# Altium PCB plc.PcbDoc
Units mm, origin at the board's own origin, x right, y up, seen from the top; angles counter-clockwise.
Board outline 93.36 x 87.51 mm, 2 copper layers (Top Layer, Bottom Layer); 106 components, 112 nets, 344 pads, 48 vias.
Unrouted connection lines stored in the file: 157.
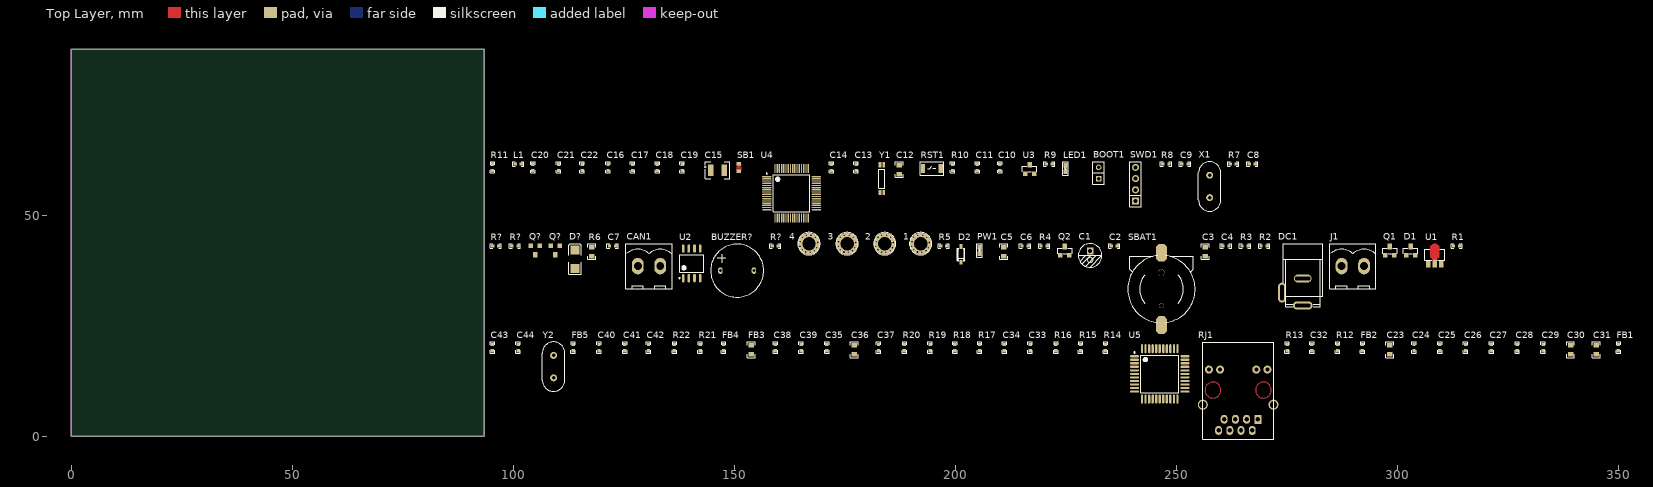
[diagram p0: Top Layer view]
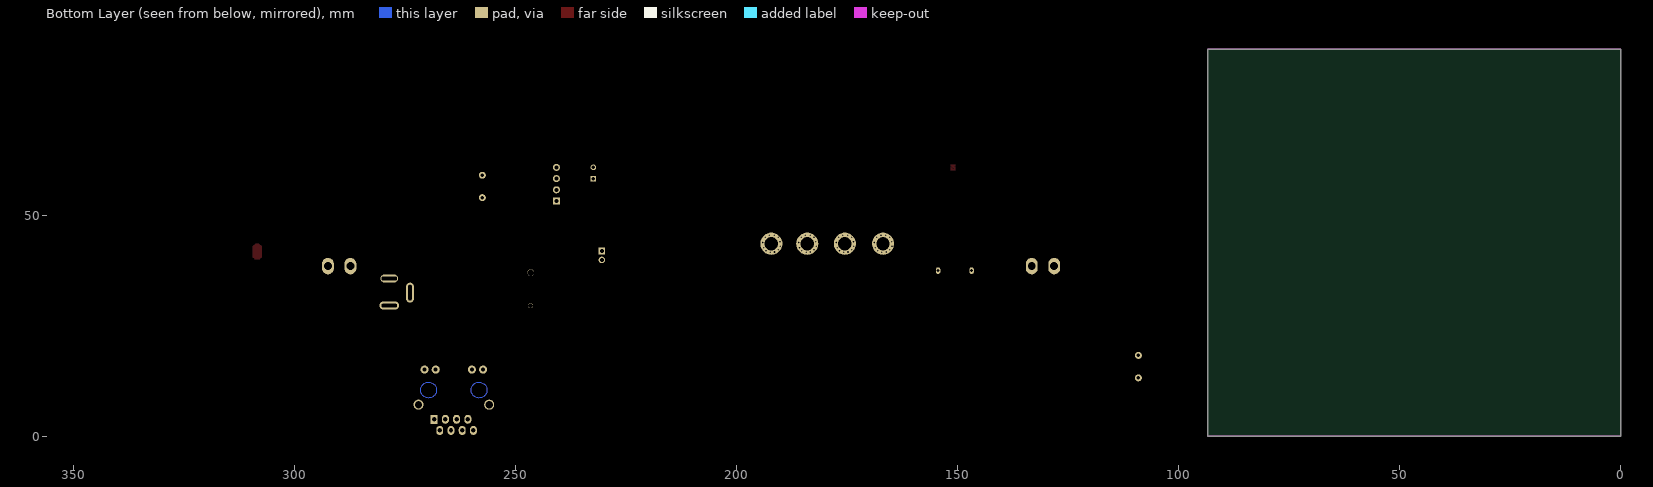
[diagram p1: Bottom Layer view, seen from below]

## Layer stack, top to bottom
Top Solder: solder mask 0.0102, Solder Resist, Dk 3.5
Top Layer: signal copper 0.0356
Dielectric 1: dielectric 0.32, FR-4, Dk 4.8
Bottom Layer: signal copper 0.0356
Bottom Solder: solder mask 0.0102, Solder Resist, Dk 3.5

## Board outline
0,0 0,87.51 93.36,87.51 93.36,0

## Design rules (kind name [scope] priority, off if disabled: settings)
Clearance [All] p1: gap=0.254
PolygonConnect [All] p1: connectstyle=Relief reliefconductorwidth=0.254 reliefentries=4 polygonreliefangle="90 Angle" airgapwidth=0.254
RoomDefinition mcu [InComponentClass('mcu')] p1: confinementstyle=ConfineIn formatcopy=TRUE lockcomponents=FALSE outline 94.488,47.625 269.113,47.625 269.113,64.897 94.488,64.897
RoomDefinition interface [InComponentClass('interface')] p2: confinementstyle=ConfineIn formatcopy=TRUE lockcomponents=FALSE outline 94.488,22.86 314.96,22.86 314.96,46.355 94.488,46.355
RoomDefinition Ethernet [InComponentClass('Ethernet')] p3: confinementstyle=ConfineIn formatcopy=TRUE lockcomponents=FALSE outline 94.488,-1.016 353.695,-1.016 353.695,24.13 94.488,24.13
RoutingVias [All] p1: holewidth=0.711 width=1.27 viastyle="Through Hole" minholewidth=0.711 minwidth=1.27 maxholewidth=0.711 maxwidth=1.27
SolderMaskExpansion [All] p1: expansion=0.102
Width [All] p1: maxlimit=0.254 minlimit=0.254 preferedwidth=0.254
30 further rules are at their usual default settings.

## Classes and differential pairs
component class mcu: BOOT1 C8 C9 C10 C11 C12 C13 C14 C15 C16 C17 C18 C19 C20 C21 C22 L1 LED1 R7 R8 R9 R10 R11 RST1 SB1 SWD1 U3 U4 X1 Y1
component class interface: 1 2 3 4 BUZZER? C1 C2 C3 C4 C5 C6 C7 CAN1 D1 D2 D? DC1 J1 PW1 Q1 Q2 Q? R1 R2 R3 R4 R5 R6 R? SBAT1 U1 U2
component class Ethernet: C23 C24 C25 C26 C27 C28 C29 C30 C31 C32 C33 C34 C35 C36 C37 C38 C39 C40 C41 C42 C43 C44 FB1 FB2 FB3 FB4 FB5 R12 R13 R14 R15 R16 R17 R18 R19 R20 R21 R22 RJ1 U5 Y2

## Components (designator, comment, footprint, x,y, rotation, side; value= is the part's Value field where it differs from the comment)
1 "TP" HOLE53 192.151,43.561 r90 top
2 "TP" HOLE53 184.023,43.561 r90 top
3 "TP" HOLE53 175.514,43.561 r90 top
4 "TP" HOLE53 166.878,43.561 r90 top
BOOT1 "CON2" SIP2 232.41,58.293 r90 top
BUZZER? "BEEP" BUZZER 150.622,37.465 r0 top
C1 "FP-6R3RE271M-F8" 6R3RE271M 230.505,40.894 r0 top
C2 "104" 0603C 235.966,43.053 r0 top
C3 "475" 0805 256.54,41.783 r0 top
C4 "104" 0603C 261.239,43.053 r0 top
C5 "475" 0805 210.947,41.783 r0 top
C6 "104" 0603C 215.773,43.053 r0 top
C7 "103" 0603C 122.428,43.053 r0 top
C8 "27pF" 0603C 267.208,61.595 r0 top
C9 "27pF" 0603C 251.968,61.595 r0 top
C10 "10pF" 0603C 210.058,60.833 r90 top
C11 "105" 0603C 204.978,60.833 r90 top
C12 "225" 0805 187.325,60.325 r0 top
C13 "10pF" 0603C 177.546,60.833 r90 top
C14 "105" 0603C 171.958,60.833 r90 top
C15 "10uF/16V" TAN-B 146.177,60.198 r0 top
C16 "104" 0603C 121.412,60.833 r90 top
C17 "104" 0603C 127,60.833 r90 top
C18 "104" 0603C 132.588,60.833 r90 top
C19 "104" 0603C 138.176,60.833 r90 top
C20 "104" 0603C 104.394,60.833 r90 top
C21 "105" 0603C 110.236,60.833 r90 top
C22 "102" 0603C 115.57,60.833 r90 top
C23 "10uF" 0805 298.323,19.558 r0 top
C24 "104" 0603C 303.784,20.066 r90 top
C25 "104" 0603C 309.626,20.066 r90 top
C26 "104" 0603C 315.468,20.066 r90 top
C27 "104" 0603C 321.31,20.066 r90 top
C28 "102" 0603C 327.152,20.066 r90 top
C29 "22pF" 0603C 332.994,20.066 r90 top
C30 "10uF" 0805 339.217,19.558 r0 top
C31 "10uF" 0805 345.059,19.558 r0 top
C32 "104" 0603C 280.67,20.066 r90 top
C33 "682" 0603C 216.916,20.066 r90 top
C34 "682" 0603C 211.074,20.066 r90 top
C35 "104" 0603C 170.942,20.066 r90 top
C36 "10uF" 0805 177.165,19.558 r0 top
C37 "104" 0603C 182.626,20.066 r90 top
C38 "103" 0603C 159.258,20.066 r90 top
C39 "103" 0603C 165.1,20.066 r90 top
C40 "104" 0603C 119.38,20.066 r90 top
C41 "104" 0603C 125.222,20.066 r90 top
C42 "102" 0603C 130.556,20.066 r90 top
C43 "27pF" 0603C 95.25,20.066 r90 top
C44 "27pF" 0603C 101.092,20.066 r90 top
CAN1 "CON2" INTERFACE-2 130.683,38.481 r0 top
D1 "BAT54" BAT54 303.022,41.91 r0 top
D2 "5.1V" SOD-123_1N5819HW 201.295,41.148 r90 top
D? "Diode" 1N5819S 113.919,37.973 r90 top
DC1 "DC-10B" DC-JACK 278.638,35.687 r90 top
FB1 "1uH" 0603R 350.012,20.066 r90 top
FB2 "1uH" 0603R 292.1,20.066 r90 top
FB3 "1uH" 0805 153.797,19.558 r0 top
FB4 "1uH" 0603R 147.574,20.066 r90 top
FB5 "1uH" 0603R 113.538,20.066 r90 top
J1 "CON2" INTERFACE-2 289.941,38.481 r0 top
L1 "1uH" 0603C 101.092,61.595 r0 top
LED1 "GREEN" LED-0603 224.917,60.579 r90 top
PW1 "RED" LED-0603 205.486,42.037 r90 top
Q1 "AP2305N/SOT-23" AP2305N_SOT23 298.323,41.91 r0 top
Q2 "AP2305N/SOT-23" AP2305N_SOT23 224.79,41.91 r0 top
Q? "BTC2411S3/SOT-323" SOT-23_HMBT3904 104.902,42.037 r0 top
Q? "HMBT3904/SOT-23" SOT-23_HMBT3904 109.474,42.037 r0 top
R1 "0R" 0603C 313.436,43.053 r0 top
R2 "2K" 0603C 269.875,43.053 r0 top
R3 "15K" 0603C 265.557,43.053 r0 top
R4 "4K7" 0603C 220.091,43.053 r0 top
R5 "10K" 0603C 197.358,43.053 r0 top
R6 "120R" 0805 117.729,41.783 r0 top
R7 "390R" 0603C 262.89,61.595 r0 top
R8 "47K" 0603C 247.65,61.595 r0 top
R9 "2K" 0603C 221.234,61.595 r0 top
R10 "10K" 0603C 199.39,60.833 r90 top
R11 "10K" 0603R 95.25,60.833 r90 top
R12 "100K" 0603R 286.512,20.066 r90 top
R13 "49R9" 0603R 275.082,20.066 r90 top
R14 "10R" 0603R 233.934,20.066 r90 top
R15 "49R9" 0603R 228.346,20.066 r90 top
R16 "22R" 0603R 222.758,20.066 r90 top
R17 "49R9" 0603R 205.486,20.066 r90 top
R18 "1K" 0603C 199.898,20.066 r90 top
R19 "1K" 0603C 194.31,20.066 r90 top
R20 "49R9" 0603R 188.468,20.066 r90 top
R21 "12K4" 0603R 142.24,20.066 r90 top
R22 "2M" 0603R 136.398,20.066 r90 top
R? "470R" 0603C 100.33,43.053 r0 top
R? "10K" 0603C 96.012,43.053 r0 top
R? "0R" 0603C 159.258,43.053 r0 top
RJ1 "HR911105A" HR911105A 264.414,14.732 r90 top
RST1 "SW" 5032-s 194.691,60.579 r0 top
SB1 "Circuit Breaker" JP2_SMD-2 151.003,60.833 r90 top
SBAT1 "BATTERY" LI1220_1 246.634,33.274 r90 top
SWD1 "CON4" SIP4 240.792,53.213 r90 top
U1 "AT5250/SOT-89" AT5250 308.483,38.989 r0 top
U2 "TJA1050" SOP-8 140.335,39.116 r90 top
U3 "XC61CN2702" XC61CN2702 216.789,60.452 r0 top
U4 "STM32F103RDT6" LQFP64_M 162.941,54.991 r0 top
U5 "ENC424J600/TQFP44" TQFP44 246.253,14.097 r0 top
X1 "8M" XTAL 257.556,56.515 r90 top
Y1 "32K768Hz" 32K768Hz 183.388,58.293 r90 top
Y2 "25Mhz" XTAL 109.093,15.748 r90 top

## Footprints (in the part's own frame and the unit in brackets; to place one, negate y for a bottom-side part, rotate by r counter-clockwise, add the part's x,y. Pads: shape width x height; smd on the part's side, far side on the other; paste and mask are expansions set on the pad)
1N5819S [mil]
  rect 80x80 smd: 1(0,0) 2(165,0)
  silkscreen extent -50,-56 221,57
6R3RE271M [mil]
  rect 58x58 / inner round 0 / far side rect 58x58 hole 35 mask+10: 1(0,40)
  round 58 / inner round 0 / far side round 58 hole 35 mask+10: 2(0,-40)
  silkscreen extent -105,-105 105,105
32K768Hz [mm]
  rect 1.2x0.6 smd: 1(3.15,0.45) 2(-3.15,0.45) 3(-3.15,-0.45) 4(3.15,-0.45)
  silkscreen extent -2.16,-0.66 2.16,0.69
0603C [mil]
  rect 30x30 smd: 1(27.5,0) 2(-27.5,0)
  silkscreen extent -50,-20 50,20
0603R [mil]
  rect 30x30 smd: 1(27.5,0) 2(-27.5,0)
  silkscreen extent -50,-20 50,20
0805 [mil]
  rect 50x40 smd: 1(0,40) 2(0,-40)
  silkscreen extent -35,-70 35,70
5032-s [mm]
  rect 1x2 smd: 1(-2,0) 2(2,0)
  silkscreen extent -2.64,-1.5 2.67,1.5
AP2305N_SOT23 [mil]
  rect 40x50 smd: D(0,40)
  rect 40x40 smd: G(-40,-40) S(40,-40)
  silkscreen extent -65,-25 65,25
AT5250 [mil]
  rect 40x60 smd mask+10: 1(-60,-3.75) 3(60,-3.75)
  rect 40x75 smd mask+10: 2(0,3.75)
  Top Layer region: 14.19,181.71 14.38,181.64 40.38,156.64 40.38,156.63 40.38,156.63 40.46,156.45 40.54,156.26 40.54,156.26 40.54,156.25 40.54,61.25 40.38,60.87 23.54,44.03 23.54,41.25 23.38,40.87 23,40.71 -23,40.71 -23.38,40.87 -23.54,41.25 -23.54,44.03 -40.38,60.87 -40.54,61.25 -40.54,156.25 -40.54,156.26 -40.54,156.27 -40.46,156.45 -40.38,156.63 -40.37,156.64 -40.37,156.65 -13.37,181.65 -13.18,181.72 -13,181.79 14,181.79
  silkscreen extent -90,31 90,131
BAT54 [mil]
  rect 40x40 smd: 1(-40,-40) 2(40,-40)
  rect 40x50 smd: 3(0,40)
  silkscreen extent -65,-25 65,25
BUZZER [mm]
  oval 1x1.5 hole 0.65: 1(-3.796,-0.001) 2(3.804,-0.001)
  silkscreen extent -5.99,-6 6,6
DC-JACK [mm]
  oval 1.8x4.5 hole 0.8 slot 3.5 at 90 deg mask+0.151: 1(-6.121,0.025)
  oval 1.8x4 hole 0.8 slot 3.5 at 90 deg mask+0.151: 2(0,0.025)
  oval 4.5x1.8 hole 0.8 slot 3.5 at 0 deg mask+0.151: 3(-3.2,4.724)
  silkscreen extent -6.35,-4.53 7.85,4.47
HOLE53 [mm]
  round 5 hole 3: 1(0,0)
  silkscreen extent -2.54,-2.54 2.54,2.54
HR911105A [mil] "HR911105A"
  rect 80x62 hole 40: 1(-429,-159)
  oval 80x62 hole 40: 2(-529,-109) 3(-429,-59) 4(-529,-9) 5(-429,41) 6(-529,91) 7(-429,141) 8(-529,191)
  round 72 hole 36: 9(13.91,-244.63) 10(13.91,-145) 11(13.91,176.87) 12(13.91,277)
  round 90 hole 65: 13(-299.08,-298.76) 13(-299.08,331.16)
  Multi-Layer circle w5: c-169,-209 r70.8
  Multi-Layer circle w5: c-169,241 r70.8
  silkscreen extent -608,-299 258,331
INTERFACE-2 [mm]
  oval 2.7x3.7 hole 1.8: 1(-2.54,0) 2(2.54,0)
  silkscreen extent -5.21,-5.08 5.21,5.08
JP2_SMD-2 [mil]
  rect 32x40 smd: 1(33.75,0) 2(-33.75,0)
  Top Layer region: 23.75,20 13.75,20 -6.25,0 13.75,-20 23.75,-20
  Top Layer region: -26.25,0 -16.25,0 3.75,20 -26.25,20
  Top Layer region: -26.25,0 -16.25,0 3.75,-20 -26.25,-20
LED-0603 [mil]
  rect 40x35 smd: 1(29.92,0) 2(-29.92,0)
  silkscreen extent -60,-26 60,26
LI1220_1 [mm]
  round 1.1 hole 1.1 unplated: 0(-3.75,0)
  round 1.5 hole 1.5 unplated: 0(3.75,0.025)
  oct 4x2.5 smd: 1(8.255,0) 2(-8.128,0)
  silkscreen extent -7.57,-7.62 7.57,7.62
LQFP64_M [mm]
  oval 2.1x0.3 smd: 1(-5.6,3.75) 2(-5.6,3.25) 3(-5.6,2.75) 4(-5.6,2.25) 5(-5.6,1.75) 6(-5.6,1.25) 7(-5.6,0.75) 8(-5.6,0.25) 9(-5.6,-0.25) 10(-5.6,-0.75) 11(-5.6,-1.25) 12(-5.6,-1.75) 13(-5.6,-2.25) 14(-5.6,-2.75) 15(-5.6,-3.25) 16(-5.6,-3.75) 33(5.6,-3.75) 34(5.6,-3.25) 35(5.6,-2.75) 36(5.6,-2.25) 37(5.6,-1.75) 38(5.6,-1.25) 39(5.6,-0.75) 40(5.6,-0.25) 41(5.6,0.25) 42(5.6,0.75) 43(5.6,1.25) 44(5.6,1.75) 45(5.6,2.25) 46(5.6,2.75) 47(5.6,3.25) 48(5.6,3.75)
  oval 0.3x2.1 smd: 17(-3.75,-5.6) 18(-3.25,-5.6) 19(-2.75,-5.6) 20(-2.25,-5.6) 21(-1.75,-5.6) 22(-1.25,-5.6) 23(-0.75,-5.6) 24(-0.25,-5.6) 25(0.25,-5.6) 26(0.75,-5.6) 27(1.25,-5.6) 28(1.75,-5.6) 29(2.25,-5.6) 30(2.75,-5.6) 31(3.25,-5.6) 32(3.75,-5.6) 49(3.75,5.6) 50(3.25,5.6) 51(2.75,5.6) 52(2.25,5.6) 53(1.75,5.6) 54(1.25,5.6) 55(0.75,5.6) 56(0.25,5.6) 57(-0.25,5.6) 58(-0.75,5.6) 59(-1.25,5.6) 60(-1.75,5.6) 61(-2.25,5.6) 62(-2.75,5.6) 63(-3.25,5.6) 64(-3.75,5.6)
  silkscreen extent -5.72,-4.15 4.15,4.57
SIP2 [mil]
  rect 50x50 hole 32: 1(0,0)
  round 50 hole 32: 2(100,0)
  silkscreen extent -50,-50 150,50
SIP4 [mm]
  rect 1.6x1.6 hole 0.9: 1(0,0)
  round 1.6 hole 0.9: 2(2.54,0) 3(5.08,0) 4(7.62,0)
  silkscreen extent -1.27,-1.27 8.89,1.27
SOD-123_1N5819HW [mm]
  rect 1.079x0.699 smd: 1(-1.787,0) 2(1.787,0)
  silkscreen extent -1.42,-0.86 1.42,0.85
SOP-8 [mm]
  oval 1.9x0.6 smd: 1(-3.35,1.905) 2(-3.35,0.635) 3(-3.35,-0.635) 4(-3.35,-1.905) 5(3.35,-1.905) 6(3.35,-0.635) 7(3.35,0.635) 8(3.35,1.905)
  silkscreen extent -3.47,-2.75 2,2.88, body extent -2.73,-2.75 2.73,2.75, height 2.03
SOT-23_HMBT3904 [mil]
  rect 40x40 smd: B(40,40) E(-40,40)
  rect 40x50 smd: C(0,-40)
TAN-B [mil]
  rect 50x100 smd: 1(-60,0) 2(60,0)
  silkscreen extent -120,-75 110,75
TQFP44 [mm] "Thin QFP, 44-Leads, Body 10x10mm, Pitch 0.8mm, IPC Low Density"
  oval 2.05x0.508 smd: 1(-5.7,4) 2(-5.7,3.2) 3(-5.7,2.4) 4(-5.7,1.6) 5(-5.7,0.8) 6(-5.7,0) 7(-5.7,-0.8) 8(-5.7,-1.6) 9(-5.7,-2.4) 10(-5.7,-3.2) 11(-5.7,-4) 23(5.7,-4) 24(5.7,-3.2) 25(5.7,-2.4) 26(5.7,-1.6) 27(5.7,-0.8) 28(5.7,0) 29(5.7,0.8) 30(5.7,1.6) 31(5.7,2.4) 32(5.7,3.2) 33(5.7,4)
  oval 0.508x2.05 smd: 12(-4,-5.7) 13(-3.2,-5.7) 14(-2.4,-5.7) 15(-1.6,-5.7) 16(-0.8,-5.7) 17(0,-5.7) 18(0.8,-5.7) 19(1.6,-5.7) 20(2.4,-5.7) 21(3.2,-5.7) 22(4,-5.7) 34(4,5.7) 35(3.2,5.7) 36(2.4,5.7) 37(1.6,5.7) 38(0.8,5.7) 39(0,5.7) 40(-0.8,5.7) 41(-1.6,5.7) 42(-2.4,5.7) 43(-3.2,5.7) 44(-4,5.7)
  silkscreen extent -5.82,-4.25 4.25,4.97, body extent -5,-5 5,5, height 1.2
XC61CN2702 [mil]
  rect 40x40 smd: 1(40,-40) 3(-40,-40)
  rect 40x50 smd: 2(0,40)
  silkscreen extent -65,-25 65,25
XTAL [mil]
  round 62 hole 31.5: 1(-100,0) 2(100,0)
  silkscreen extent -220,-100 220,100

## Part data
BOOT1 CAN1 J1 SWD1: "Connector"
BUZZER?: "蜂鸣器"
C1: library part "CAP POL"
C2 C3 C4 C5 C6 C8 C9 C10 C11 C12 C13 C14 C16 C17 C18 C19 C20 C21 C22 C23 C24 C25 C26 C27 C28 C29 C30 C31 C32 C33 C34 C35 C36 C37 C38 C39 C40 C41 C42 C43 C44: library part CAP, "Capacitor"
C7: library part Cap, "Capacitor"
C15: library part "CAPACITOR POL_0"
D2: library part "Diode 10TQ035", "Schottky Rectifier"
D?: "二极管"
DC1: library part PJ202A
FB1 FB2 FB3 FB4 FB5 L1: library part Inductor, "Inductor"
LED1 PW1: library part LED
Q?: library part HMBT3904/SOT-23
R1 R2 R3 R4 R5 R8 R9 R11 R12 R13 R14 R15 R16 R17 R20 R21 R22 R? R? R?: library part res1, "Resistor"
R6 R7 R10: library part Res1, "Resistor"
R18 R19: library part RES1
RST1: library part SW_PUSH
U1: library part XC62FP3302PR
X1 Y2: library part CRYSTAL

## Via types
v1: diameter 0.635, hole 0.356, Top Layer to Bottom Layer, 48 vias

## Nets (pads, with @x,y where several pads share a name; then routed paths per layer and width w, separated by ;. In a path a pad name is that pad's centre, name@x,y a point inside that pad or via, vN(x,y) a via of type N, cw(c..) or ccw(c..) an arc to the next point about the centre after c; other vN are vias at no path point)
3V3: C1.1 C2.1 D1.1 Q?.C@109.474,41.021 R2.1 R?.2@158.559,43.053 U1.3
8M_XIN: R7.1 U4.5
8M_XOUT: C9.2 U4.6 X1.1
+3.3V: C23.1 C24.2 C25.2 C26.2 C35.2 C40.2 FB1.1 FB4.1 R12.2 U5.44
+3VSB: SB1.1
/ETH_INT: R12.1 U5.24
/ETH_SPI_CS: U5.34
/SRST: C12.1 R8.2 RST1.2 U3.3 U4.7
AD0: U5.38
AD1: U5.39
AD2: U5.40
AD3: U5.41
AD4: U5.5
AD5: U5.6
AD6: U5.7
AD7: U5.8
AGND: C27.1 C28.1 C29.1 C30.2 C31.2 C32.1 C37.1 C38.1 C39.1 FB2.2 FB3.2 RJ1.8 RJ1.13 U5.13 U5.14 U5.19 U5.22
BOOT: BOOT1.1 R10.2 U4.60
CLKOUT: U5.23
DC-5V: DC1.1 J1.2 Q1.S Q2.S R1.2 R3.2
DGND: DC1.2 DC1.3 J1.1
ETH_SPI_SCLK: U5.37
ETH_SPI_SI: U5.36
ETH_SPI_SO: R16.1
GND: 1.1 2.1 3.1 4.1 C1.2 C2.2 C3.2 C4.2 C5.1 C6.2 C7.2 D2.2 PW1.2 Q?.E@103.886,43.053 R5.1 R?.1@96.71,43.053 SBAT1.2 U1.1 U2.2 U2.8
  other v1: 167.132,41.605 175.768,41.605 184.277,41.605 192.405,41.605 166.167,41.681 174.803,41.681 183.312,41.681 191.44,41.681 168.097,41.935 176.733,41.935 185.242,41.935 193.37,41.935 165.354,42.215 173.99,42.215 182.499,42.215 190.627,42.215 168.631,42.672 177.267,42.672 185.776,42.672 193.904,42.672 164.846,42.977 173.482,42.977 181.991,42.977 190.119,42.977 168.834,43.84 177.47,43.84 185.979,43.84 194.107,43.84 164.922,44.018 173.558,44.018 182.067,44.018 190.195,44.018 165.354,45.009 173.99,45.009 182.499,45.009 190.627,45.009 168.275,45.034 176.911,45.034 185.42,45.034 193.548,45.034 166.243,45.466 174.879,45.466 183.388,45.466 191.516,45.466 167.335,45.491 175.971,45.491 184.48,45.491 192.608,45.491
LED0: LED1.2 U4.41
LED_A: RJ1.9 U5.10
LED_B: RJ1.12 U5.9
NetBUZZER?_1: BUZZER?.1 D?.2 R?.1@159.957,43.053
NetBUZZER?_2: BUZZER?.2 D?.1 Q?.C@104.902,41.021
NetC3_1: C3.1 C4.1 D1.3 SBAT1.1
NetC8_2: C8.2 R7.2 X1.2
NetC14_2: C14.2 SB1.2 U4.1
NetC21_2: C21.2 C22.2 L1.2 U4.13
NetC33_2: C33.2 R17.2 U5.17
NetC34_2: C34.2 R20.1 U5.16
NetC36_1: C36.1 U5.43
NetC38_2: C38.2 R17.1 R20.2 RJ1.5
NetC39_2: C39.2 R14.1 RJ1.4
NetC43_2: C43.2 R22.2 U5.2 Y2.2
NetC44_2: C44.2 R22.1 U5.3 Y2.1
NetCAN1_1: CAN1.1 R6.2 U2.6
NetCAN1_2: CAN1.2 R6.1 U2.7
NetD2_1: D2.1 R3.1 R4.2
NetLED1_1: LED1.1 R9.1
NetPW1_1: PW1.1 R2.2
NetQ1_G: Q1.G Q2.D R5.2
NetQ2_G: Q2.G R4.1
NetQ?_B: Q?.B@110.49,43.053
NetQ?_E: Q?.E@108.458,43.053 R?.1@101.028,43.053
NetR16_2: R16.2 U5.35
NetR18_1: R18.1 RJ1.10
NetR19_1: R19.1 RJ1.11
NetR21_1: R21.1 U5.11
NetU2_1: U2.1
NetU2_4: U2.4
PA0: U4.14
PA1: U4.15
PA2: U4.16
PA3: U4.17
PA4: U4.20
PA5: U4.21
PA6: U4.22
PA7: U4.23
PA9: U4.42
PA10: U4.43
PA11: U4.44
PA12: U4.45
PA13: SWD1.2 U4.46
PA14: SWD1.3 U4.49
PA15: U4.50
PB0: U4.26
PB1: U4.27
PB2: R11.1 U4.28
PB3: U4.55
PB4: U4.56
PB5: U4.57
PB6: U4.58
PB7: U4.59
PB8: U4.61
PB9: U4.62
PB10: U4.29
PB11: U4.30
PB12: U4.33
PB13: U4.34
PB14: U4.35
PB15: U4.36
PC0: U4.8
PC1: U4.9
PC2: U4.10
PC3: U4.11
PC4: U4.24
PC5: U4.25
PC6: U4.37
PC7: U4.38
PC8: U4.39
PC9: U4.40
PC10: U4.51
PC11: U4.52
PC12: U4.53
PC13: U4.2
PC14: C10.2 U4.3 Y1.4
PC15: C13.2 U4.4 Y1.1
PD2: U4.54
RX+: C34.1 RJ1.3
RX-: C33.1 RJ1.6
TX+: R15.1 RJ1.1 U5.20
TX-: R13.2 RJ1.2 U5.21
VD50: C5.2 C6.1 C7.1 Q1.D R1.1 U1.2 U2.3
VDDOSC: C41.2 C42.2 FB4.2 U5.4
VDDTX: C27.2 C28.2 C29.2 C30.1 C31.1 C32.2 C37.2 FB1.2 R13.1 R14.2 R15.2 U5.12 U5.15 U5.18
VSSOCS: C41.1 C42.1 C43.1 C44.1 FB5.2 U5.1
pads on no net: BOOT1.2 C8.1 C9.1 C10.1 C11.1 C11.2 C12.2 C13.1 C14.1 C15.1 C15.2 C16.1 C16.2 C17.1 C17.2 C18.1 C18.2 C19.1 C19.2 C20.1 C20.2 C21.1 C22.1 C23.2 C24.1 C25.1 C26.1 C35.1 C36.2 C40.1 D1.2 FB2.1 FB3.1 FB5.1 L1.1 Q?.B@105.918,43.053 R8.1 R9.2 R10.1 R11.2 R18.2 R19.2 R21.2 R?.2@95.313,43.053 R?.2@99.632,43.053 RJ1.7 RST1.1 SBAT1.0 SWD1.1 SWD1.4 U2.5 U3.1 U3.2 U4.12 U4.18 U4.19 U4.31 U4.32 U4.47 U4.48 U4.63 U4.64 U5.25 U5.26 U5.27 U5.28 U5.29 U5.30 U5.31 U5.32 U5.33 U5.42 Y1.2 Y1.3

## Keep-outs
Keep-Out Layer:
  the board outline again, w0.254

## Silkscreen, mask and mechanical layers (free items; w line width, h text height)
Drill Drawing:
  circle w0.254: c89.357,3.995 r1.5
  circle w0.254: c89.357,83.515 r1.5
  circle w0.254: c3.998,83.515 r1.5
  circle w0.254: c3.998,3.988 r1.5
  lines w0.254: 11.43,87.51 11.43,78.765 81.93,78.765 ; 11.455,0.051 11.455,8.738 81.93,8.738 ; 53.174,77.143 55.245,78.613 ; 53.708,78.145 55.245,78.613 ; 54.296,77.317 55.245,78.613 ; 55.098,78.82 55.392,78.406 ; 57.597,68.751 57.973,68.409 ; 58.437,70.048 57.785,68.58 ; 59.187,69.364 57.785,68.58 ; 61.036,72.144 57.785,68.58 ; 66.909,87.202 67.203,86.788 ; 68.005,88.291 67.056,86.995 ; 68.593,87.463 67.056,86.995 ; 69.127,88.465 67.056,86.995 ; 71.679,83.812 74.93,87.376 ; 73.528,86.592 74.93,87.376 ; 74.278,85.908 74.93,87.376 ; 74.742,87.547 75.118,87.205 ; 81.422,-1.524 81.93,0 ; 81.422,10.262 81.93,8.738 ; 81.422,77.241 81.93,78.765 ; 81.422,89.027 81.93,87.503 ; 81.676,0 82.184,0 ; 81.676,8.738 82.184,8.738 ; 81.676,78.765 82.184,78.765 ; 81.676,87.503 82.184,87.503 ; 81.93,-2.54 81.93,0 ; 81.93,0.01 81.93,8.738 ; 81.93,11.278 81.93,8.738 ; 81.93,76.225 81.93,78.765 ; 81.93,90.043 81.93,87.503 ; 82.438,-1.524 81.93,0 ; 82.438,10.262 81.93,8.738 ; 82.438,77.241 81.93,78.765 ; 82.438,89.027 81.93,87.503 ; 81.93,78.765 81.93,87.503
  text "length" at 32.563,91.745 h1.52
  text "8.738 (mm)" at 85.587,76.126 h1.52 r90
  text "14.483 (mm)" at 57.034,75.399 h1.52 r35.36
  text "25.441 (mm)" at 61.882,71.715 h1.52 r47.63
  text "width" at -4.394,32.36 h1.52 r90
  text "8.738 (mm)" at 85.587,-2.639 h1.52 r90

## Dimensions
0,0 to 0,87.51 on Drill Drawing
0,87.51 to 93.36,87.51 on Drill Drawing
-3.48,3.995 to -3.48,0 on Drill Drawing
-3.302,87.51 to -3.353,83.515 on Drill Drawing
93.36,90.297 to 89.357,91.11 on Drill Drawing
3.998,91.059 to 0,91.059 on Drill Drawing
0,91.313 to 11.43,92.507 on Drill Drawing
93.36,90.653 to 81.93,90.907 on Drill Drawing